# EAGLE board tc08n211 (EAGLE 6.6.0), part 1 of 2
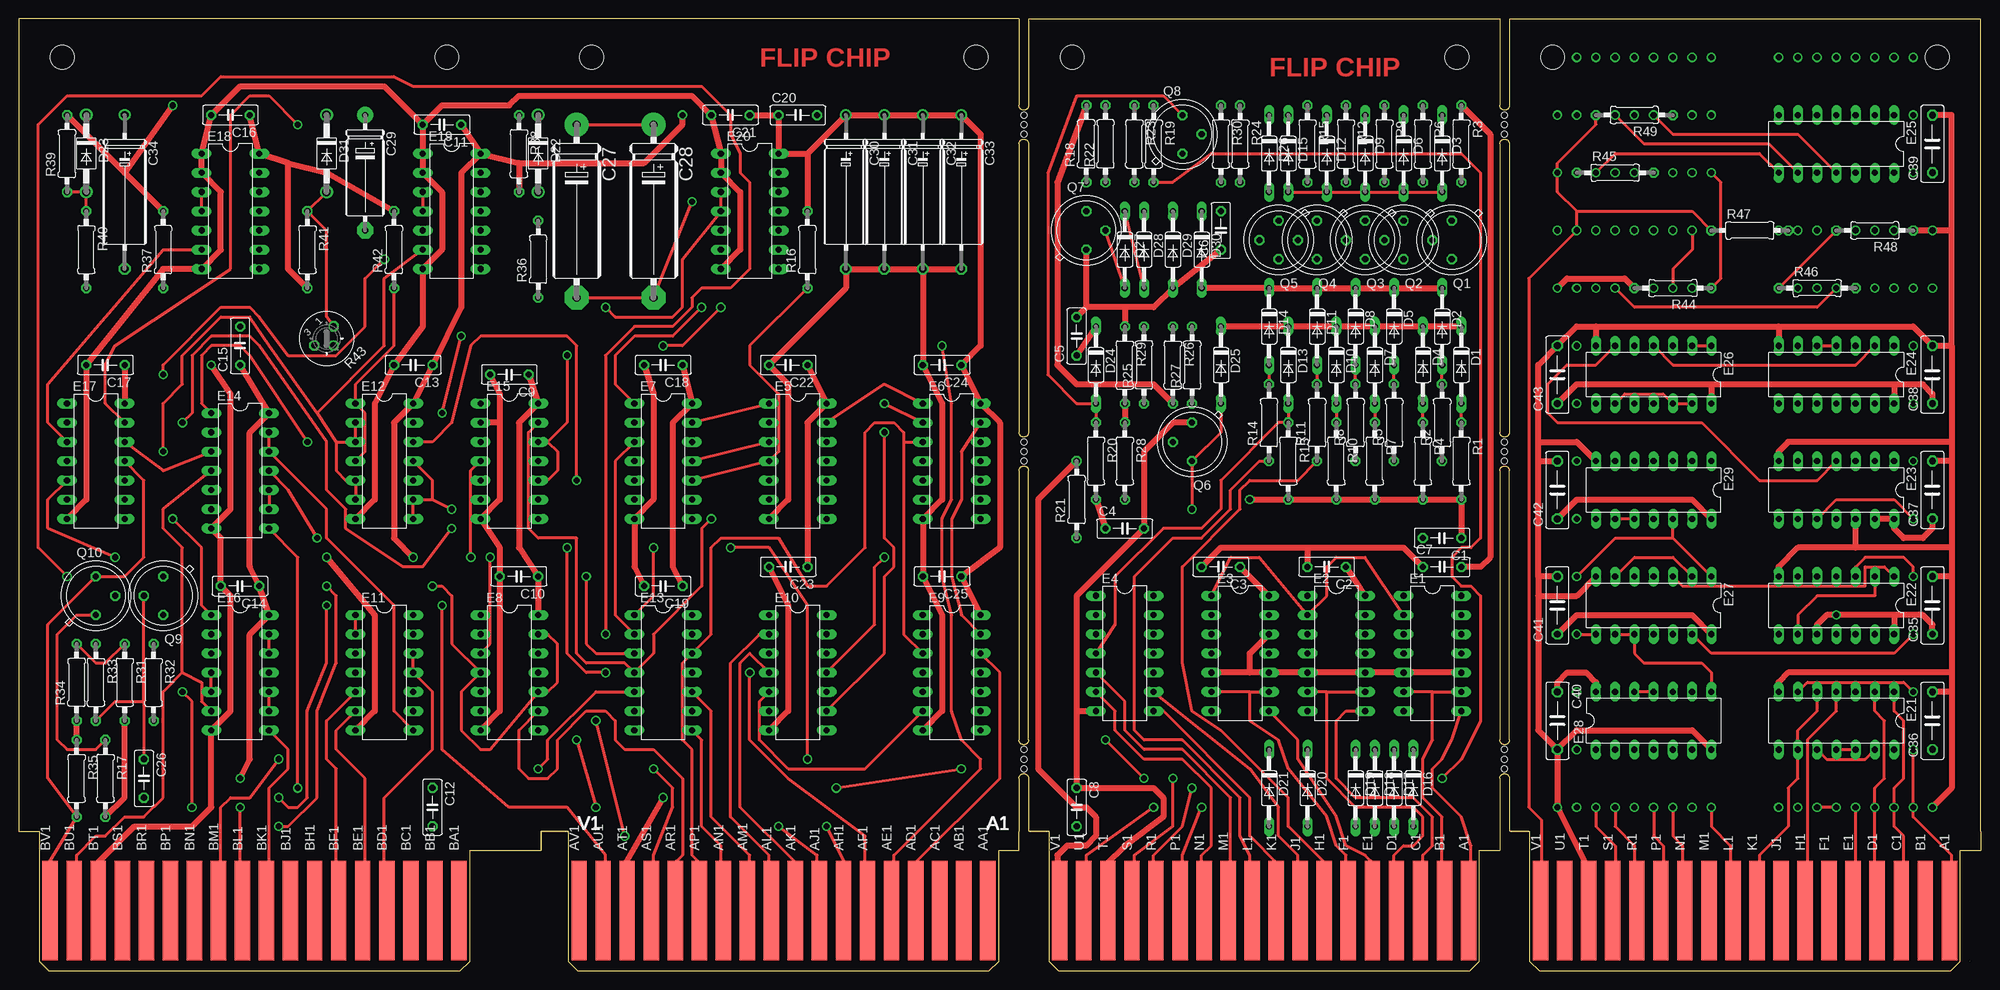
[diagram p0: board, top side]
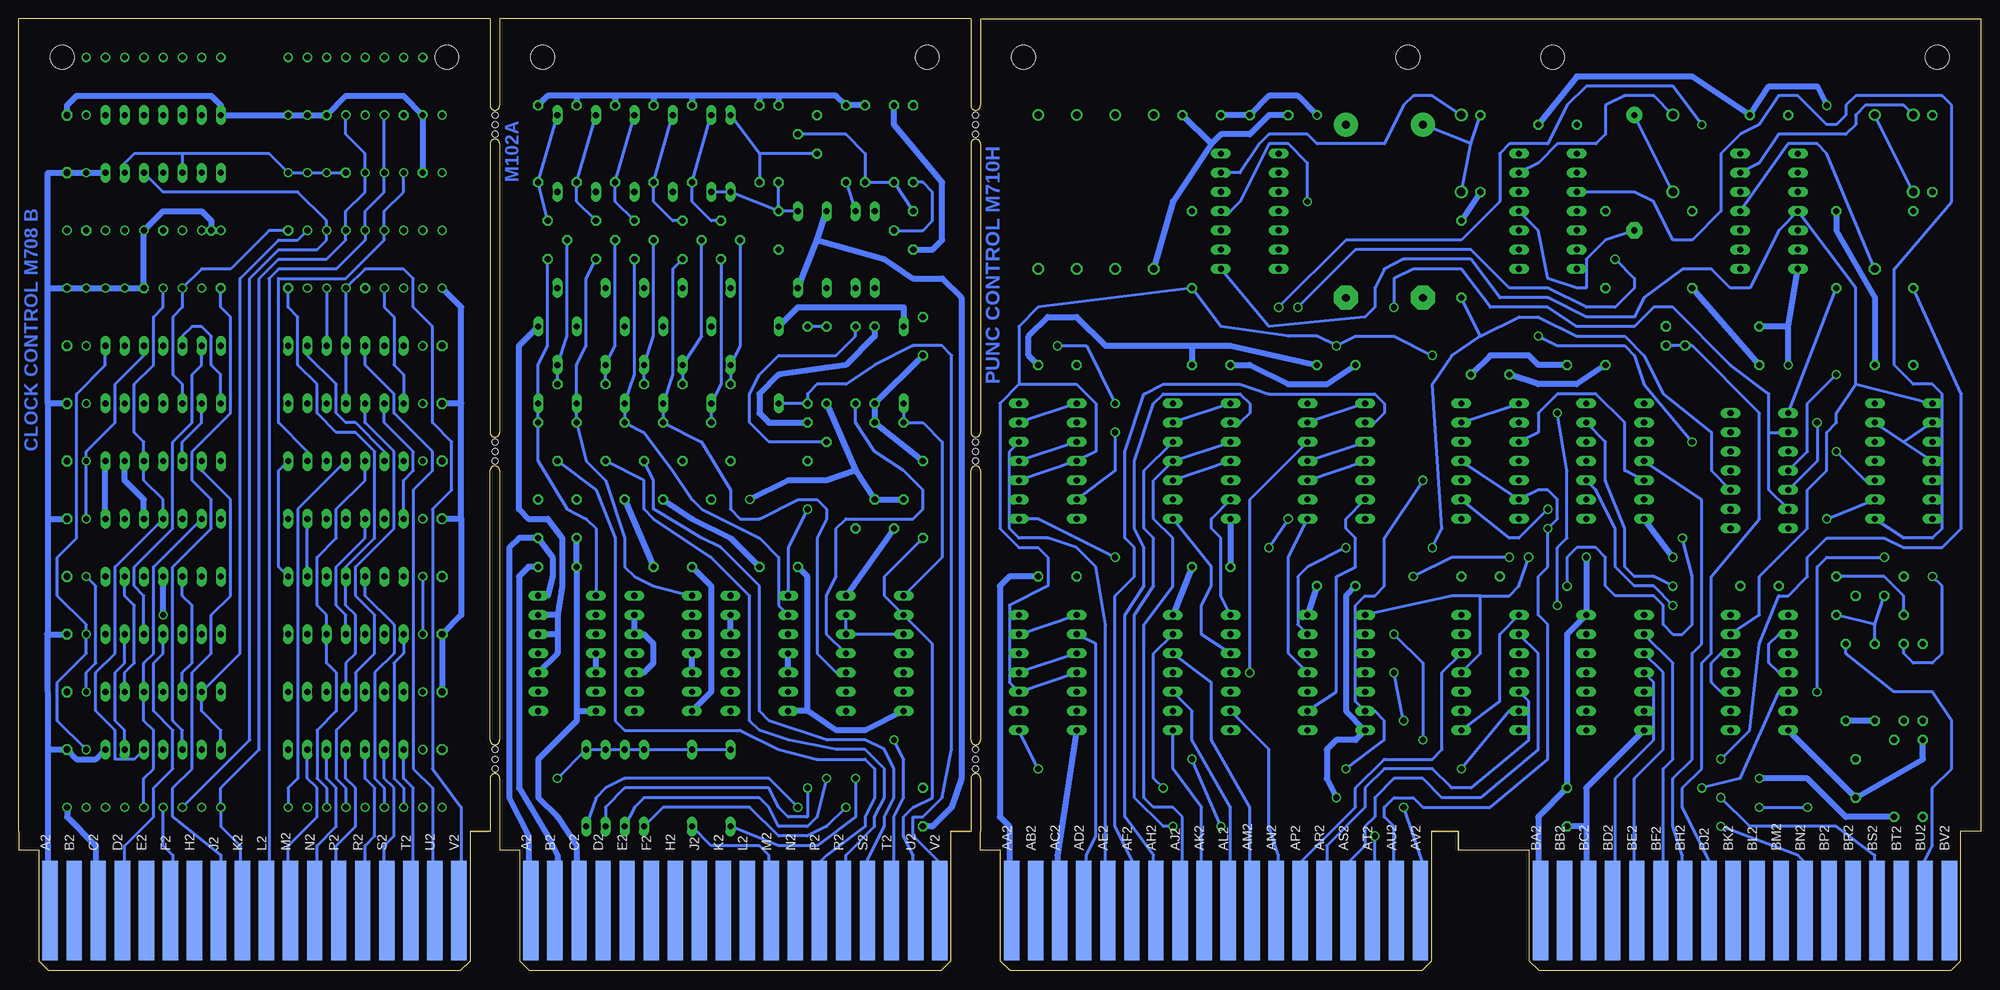
[diagram p1: board, bottom side, seen from below]

Size 259.08 x 125.73 mm. Coordinates in mm from the lower left corner, seen from the top.
Copper layers (1+16): Top 0.035mm / dielectric 1.5mm / Bottom 0.035mm
Design rules "16mils": minimum track width 16mil, minimum drill 32mil, track to track 15mil, track to pad 10mil, pad to pad 10mil, via to via 10mil, smd to smd 10mil, copper to edge 13mil, drill to drill 10mil, minimum pad ring 10mil, minimum via ring 8mil, stop-mask expansion 0mil, vias tented up to drill 0mil, thermal gap 10mil
Net classes: 1 Supply: width 0.813 mm

## Footprints (pad centres in the part's own frame; a part is rotated, then mirrored left to right if it is on the bottom)
C050-025X075 = drill 0.813 octagon: 1 -2.54,0; 2 2.54,0
E22-6 = drill 1.016 pad 3.15: + -11.43,0 | drill 1.016 pad 3.15 octagon: - 11.43,0
E15-5 = drill 0.813 pad 2.159: + -7.62,0 | drill 0.813 pad 2.159 octagon: - 7.62,0
E12-8 = drill 1.016: + -10.16,0 | drill 1.016 octagon: - 10.16,0
C075-032X103 = drill 0.914 octagon: 1 -3.81,0; 2 3.81,0
DO35-10 = drill 0.813 long: A 5.08,0; C -5.08,0
DO41-10 = drill 1.118: A 5.08,0; C -5.08,0
DIL14 = drill 0.813 long: 1 -7.62,-3.81; 2 -5.08,-3.81; 3 -2.54,-3.81; 4 0,-3.81; 5 2.54,-3.81; 6 5.08,-3.81; 7 7.62,-3.81; 8 7.62,3.81; 9 5.08,3.81; 10 2.54,3.81; 11 0,3.81; 12 -2.54,3.81; 13 -5.08,3.81; 14 -7.62,3.81
DECPROTO211 = hole 3.175: 253.365,120.65; 202.565,120.65; 139.116,120.65; 189.916,120.65; 126.416,120.65; 75.616,120.65; 56.515,120.65; 5.715,120.65 | hole 0.813: 132.715,69.85; 132.715,68.58; 132.715,67.31; 132.715,26.67; 132.715,27.94; 132.715,29.21; 132.715,113.03; 132.715,110.49; 132.715,111.76; 196.215,69.85; 196.215,68.58; 196.215,67.31; 196.215,26.67; 196.215,27.94; 196.215,29.21; 196.215,113.03; 196.215,110.49; 196.215,111.76
TO39 = drill 0.813 octagon: 1 0,-2.54; 2 2.54,0; 3 0,2.54
TO5 = drill 0.813 octagon: 1 0,-2.54; 2 2.54,0; 3 0,2.54
0207/10 = drill 0.813 octagon: 1 -5.08,0; 2 5.08,0
RJ6 = drill 0.813 octagon: A -1.778,-0.508; E 1.778,-0.508; S 0,1.27
EDGE-CON2 = smd 13.106 x 2.032: A1 7.938,4.128; B1 7.938,7.303; C1 7.938,10.477; D1 7.938,13.652; E1 7.938,16.828; F1 7.938,20.003; H1 7.938,23.177; J1 7.938,26.352; K1 7.938,29.527; L1 7.938,32.703; M1 7.938,35.877; N1 7.938,39.053; P1 7.938,42.227; R1 7.938,45.403; S1 7.938,48.578; T1 7.938,51.752; U1 7.938,54.928; V1 7.938,58.102 | smd 13.106 x 2.032 bottom: A2 7.938,4.128; B2 7.938,7.303; C2 7.938,10.477; D2 7.938,13.652; E2 7.938,16.828; F2 7.938,20.003; H2 7.938,23.177; J2 7.938,26.352; K2 7.938,29.527; L2 7.938,32.703; M2 7.938,35.877; N2 7.938,39.053; P2 7.938,42.227; R2 7.938,45.403; S2 7.938,48.578; T2 7.938,51.752; U2 7.938,54.928; V2 7.938,58.102
EDGE-CON4 = smd 13.106 x 2.032: AA1 7.938,4.128; AB1 7.938,7.303; AC1 7.938,10.477; AD1 7.938,13.652; AE1 7.938,16.828; AF1 7.938,20.003; AH1 7.938,23.177; AJ1 7.938,26.352; AK1 7.938,29.527; AL1 7.938,32.703; AM1 7.938,35.877; AN1 7.938,39.053; AP1 7.938,42.227; AR1 7.938,45.403; AS1 7.938,48.578; AT1 7.938,51.752; AU1 7.938,54.928; AV1 7.938,58.102; BA1 7.938,73.978; BB1 7.938,77.153; BC1 7.938,80.328; BD1 7.938,83.502; BE1 7.938,86.677; BF1 7.938,89.853; BH1 7.938,93.028; BJ1 7.938,96.203; BK1 7.938,99.377; BL1 7.938,102.552; BM1 7.938,105.728; BN1 7.938,108.903; BP1 7.938,112.078; BR1 7.938,115.252; BS1 7.938,118.427; BT1 7.938,121.603; BU1 7.938,124.778; BV1 7.938,127.953 | smd 13.106 x 2.032 bottom: AA2 7.938,4.128; AB2 7.938,7.303; AC2 7.938,10.477; AD2 7.938,13.652; AE2 7.938,16.828; AF2 7.938,20.003; AH2 7.938,23.177; AJ2 7.938,26.352; AK2 7.938,29.527; AL2 7.938,32.703; AM2 7.938,35.877; AN2 7.938,39.053; AP2 7.938,42.227; AR2 7.938,45.403; AS2 7.938,48.578; AT2 7.938,51.752; AU2 7.938,54.928; AV2 7.938,58.102; BA2 7.938,73.978; BB2 7.938,77.153; BC2 7.938,80.328; BD2 7.938,83.502; BE2 7.938,86.677; BF2 7.938,89.853; BH2 7.938,93.028; BJ2 7.938,96.203; BK2 7.938,99.377; BL2 7.938,102.552; BM2 7.938,105.728; BN2 7.938,108.903; BP2 7.938,112.078; BR2 7.938,115.252; BS2 7.938,118.427; BT2 7.938,121.603; BU2 7.938,124.778; BV2 7.938,127.953

## Placement (x,y rotation side)
C1  .01uF  [C050-025X075]  187.96,57.15 180 top
C2  .01uF  [C050-025X075]  172.72,53.34 180 top
C3  .01uF  [C050-025X075]  158.75,53.34 180 top
C4  .01uF  [C050-025X075]  146.05,58.42 0 top
C5  .01uF  [C050-025X075]  139.7,83.82 90 top
C6  .01uF  [C050-025X075]  158.75,97.79 90 top
C7  .01uF  [C050-025X075]  187.96,53.34 0 top
C8  .01uF  [C050-025X075]  139.7,21.59 270 top
C9  .01uf  [C050-025X075]  64.77,78.74 180 top
C10  .01uf  [C050-025X075]  66.04,52.07 180 top
C11  .01uf  [C050-025X075]  55.88,111.76 180 top
C12  .01uf  [C050-025X075]  54.61,21.59 270 top
C13  .01uf  [C050-025X075]  52.07,80.01 180 top
C14  .01uf  [C050-025X075]  29.21,50.8 180 top
C15  .01uf  [C050-025X075]  29.21,82.55 90 top
C16  .01uf  [C050-025X075]  27.94,113.03 180 top
C17  .01uf  [C050-025X075]  11.43,80.01 180 top
C18  .01uf  [C050-025X075]  85.09,80.01 180 top
C19  .01uf  [C050-025X075]  85.09,50.8 180 top
C20  .01uf  [C050-025X075]  102.87,113.03 0 top
C21  .01uf  [C050-025X075]  93.98,113.03 180 top
C22  .01uf  [C050-025X075]  101.6,80.01 180 top
C23  .01uf  [C050-025X075]  101.6,53.34 180 top
C24  .01uf  [C050-025X075]  121.92,80.01 180 top
C25  .01uf  [C050-025X075]  121.92,52.07 180 top
C26  .01uf  [C050-025X075]  16.51,25.4 270 top
C27  150  [E22-6]  73.66,100.33 270 top
C28  150  [E22-6]  83.82,100.33 270 top
C29  2.2uf  [E15-5]  45.72,105.41 270 top
C30  6.8uF  [E12-8]  109.22,102.87 270 top
C31  6.8uF  [E12-8]  114.3,102.87 270 top
C32  6.8uF  [E12-8]  119.38,102.87 270 top
C33  6.8uF  [E12-8]  124.46,102.87 270 top
C34  180  [E12-8]  13.97,102.87 270 top
C35  .01uf  [C075-032X103]  252.73,48.26 90 top
C36  .01uf  [C075-032X103]  252.73,33.02 90 top
C37  .01uf  [C075-032X103]  252.73,63.5 90 top
C38  .01uf  [C075-032X103]  252.73,78.74 90 top
C39  .01uf  [C075-032X103]  252.73,109.22 90 top
C40  .01uf  [C075-032X103]  203.2,33.02 270 top
C41  .01uf  [C075-032X103]  203.2,48.26 90 top
C42  .01uf  [C075-032X103]  203.2,63.5 90 top
C43  .01uf  [C075-032X103]  203.2,78.74 90 top
D1  1N4154  [DO35-10]  190.5,80.01 270 top
D2  1N4154  [DO35-10]  187.96,85.09 270 top
D3  1N4154  [DO35-10]  187.96,107.95 270 top
D4  1N4154  [DO35-10]  185.42,80.01 270 top
D5  1N4154  [DO35-10]  181.61,85.09 270 top
D6  1N4154  [DO35-10]  182.88,107.95 270 top
D7  1N4154  [DO35-10]  179.07,80.01 270 top
D8  1N4154  [DO35-10]  176.53,85.09 270 top
D9  1N4154  [DO35-10]  177.8,107.95 270 top
D10  1N4154  [DO35-10]  173.99,80.01 270 top
D11  1N4154  [DO35-10]  171.45,85.09 270 top
D12  1N4154  [DO35-10]  172.72,107.95 270 top
D13  1N4154  [DO35-10]  167.64,80.01 270 top
D14  1N4154  [DO35-10]  165.1,85.09 270 top
D15  1N4154  [DO35-10]  167.64,107.95 270 top
D16  1N4154  [DO35-10]  184.15,24.13 270 top
D17  1N4154  [DO35-10]  181.61,24.13 270 top
D18  1N4154  [DO35-10]  179.07,24.13 270 top
D19  1N4154  [DO35-10]  176.53,24.13 270 top
D20  1N4154  [DO35-10]  170.18,24.13 270 top
D21  1N4154  [DO35-10]  165.1,24.13 270 top
D22  1N4154  [DO41-10]  68.58,107.95 270 top
D23  1N4154  [DO41-10]  8.89,107.95 270 top
D24  1N4154  [DO35-10]  142.24,80.01 270 top
D25  1N4154  [DO35-10]  158.75,80.01 270 top
D26  1N4154  [DO35-10]  165.1,107.95 270 top
D27  1N914  [DO35-10]  146.05,95.25 270 top
D28  1N914  [DO35-10]  148.59,95.25 270 top
D29  1N914  [DO35-10]  152.4,95.25 270 top
D30  1N914  [DO35-10]  156.21,95.25 270 top
D31  1N4154  [DO41-10]  40.64,107.95 270 top
E1  74H40N  [DIL14]  186.69,41.91 270 top
E2  74H40N  [DIL14]  173.99,41.91 270 top
E3  74H40N  [DIL14]  161.29,41.91 270 top
E4  7400N  [DIL14]  146.05,41.91 270 top
E5  7474N  [DIL14]  102.87,67.31 270 top
E6  7474N  [DIL14]  123.19,67.31 270 top
E7  7474N  [DIL14]  85.09,67.31 270 top
E8  7400N  [DIL14]  64.77,39.37 270 top
E9  7474N  [DIL14]  123.19,39.37 270 top
E10  7404N  [DIL14]  102.87,39.37 270 top
E11  7430N  [DIL14]  48.26,39.37 270 top
E12  7401N  [DIL14]  48.26,67.31 270 top
E13  7404N  [DIL14]  85.09,39.37 270 top
E14  7400N  [DIL14]  29.21,66.04 270 top
E15  7474N  [DIL14]  64.77,67.31 270 top
E16  7440  [DIL14]  29.21,39.37 270 top
E17  7474N  [DIL14]  10.16,67.31 270 top
E18  9601  [DIL14]  27.94,100.33 270 top
E19  9601  [DIL14]  57.15,100.33 270 top
E20  9601  [DIL14]  96.52,100.33 270 top
E21  7401N  [DIL14]  240.03,33.02 180 top
E22  7474N  [DIL14]  240.03,48.26 180 top
E23  7474N  [DIL14]  240.03,63.5 180 top
E24  7400N  [DIL14]  240.03,78.74 180 top
E25  7400N  [DIL14]  240.03,109.22 180 top
E26  7400N  [DIL14]  215.9,78.74 180 top
E27  7400N  [DIL14]  215.9,48.26 180 top
E28  7430N  [DIL14]  215.9,33.02 0 top
E29  7420N  [DIL14]  215.9,63.5 180 top
E$1  [DECPROTO211]  0,0 0 top
Q1  PN3569  [TO39]  189.23,96.52 180 top
Q2  PN3569  [TO39]  182.88,96.52 180 top
Q3  PN3569  [TO39]  177.8,96.52 180 top
Q4  PN3569  [TO39]  171.45,96.52 180 top
Q5  PN3569  [TO39]  166.37,96.52 180 top
Q6  PN3569  [TO39]  154.94,69.85 180 top
Q7  PN3640  [TO39]  140.97,97.79 0 top
Q8  PN3569  [TO39]  153.67,110.49 0 top
Q9  DEC6534D  [TO5]  19.05,49.53 180 top
Q10  DEC6534D  [TO5]  10.16,49.53 0 top
R1  1.5K  [0207/10]  190.5,67.31 270 top
R2  470  [0207/10]  187.96,72.39 90 top
R3  1.8K  [0207/10]  190.5,109.22 270 top
R4  1.5K  [0207/10]  185.42,67.31 270 top
R5  470  [0207/10]  181.61,72.39 90 top
R6  1.8K  [0207/10]  185.42,109.22 270 top
R7  1.5K  [0207/10]  179.07,67.31 270 top
R8  470  [0207/10]  176.53,72.39 90 top
R9  1.8K  [0207/10]  180.34,109.22 270 top
R10  1.5K  [0207/10]  173.99,67.31 270 top
R11  470  [0207/10]  171.45,72.39 90 top
R12  1.8K  [0207/10]  175.26,109.22 270 top
R13  1.5K  [0207/10]  167.64,67.31 270 top
R14  470  [0207/10]  165.1,72.39 90 top
R15  1.8K  [0207/10]  170.18,109.22 270 top
R16  1K  [0207/10]  104.14,95.25 90 top
R17  56  [0207/10]  11.43,25.4 270 top
R18  47K  [0207/10]  140.97,109.22 90 top
R19  15K  [0207/10]  149.86,109.22 270 top
R20  1.5K  [0207/10]  142.24,67.31 270 top
R21  8.2K  [0207/10]  139.7,62.23 90 top
R22  1K  [0207/10]  143.51,109.22 90 top
R23  3.3K  [0207/10]  147.32,109.22 270 top
R24  2.7K  [0207/10]  161.29,109.22 270 top
R25  750  [0207/10]  148.59,80.01 90 top
R26  750  [0207/10]  152.4,80.01 270 top
R27  750  [0207/10]  154.94,80.01 90 top
R28  330  [0207/10]  146.05,67.31 270 top
R29  750  [0207/10]  146.05,80.01 270 top
R30  2.7K  [0207/10]  158.75,109.22 270 top
R31  5.6K  [0207/10]  13.97,38.1 270 top
R32  100  [0207/10]  17.78,38.1 270 top
R33  3K  [0207/10]  10.16,38.1 270 top
R34  3K  [0207/10]  7.62,38.1 90 top
R35  150  [0207/10]  7.62,25.4 270 top
R36  1K  [0207/10]  68.58,93.98 90 top
R37  1K  [0207/10]  19.05,95.25 90 top
R38  51K  [0207/10]  66.04,107.95 270 top
R39  51K  [0207/10]  6.35,107.95 90 top
R40  7.5K  [0207/10]  8.89,95.25 270 top
R41  15K  [0207/10]  38.1,95.25 270 top
R42  1K  [0207/10]  49.53,95.25 90 top
R43  50K  [RJ6]  40.64,83.5 225 top
R44  750  [0207/10]  218.44,90.17 180 top
R45  1.5K  [0207/10]  210.82,105.41 0 top
R46  750  [0207/10]  237.49,90.17 0 top
R47  750  [0207/10]  228.6,97.79 0 top
R48  1.5K  [0207/10]  245.11,97.79 180 top
R49  1.5K  [0207/10]  213.36,113.03 180 top
U$1  [EDGE-CON2]  259.08,0 90 top
U$2  [EDGE-CON4]  132.08,0 90 top
U$3  [FLIPCHIP]  78.74,124.46 270 top
U$8  [EDGE-CON2]  195.58,0 90 top

## Library data of the parts
C1-C29 C35-C43 R1-R42 R44-R49 = rcl
C30-C34 E18-E20 E$1 U$1-U$3 U$8 = dec-con
D1-D31 = diode
E1-E17 E21-E29 = 74xx-us
Q1-Q8 = transistor
Q9 Q10 = transistor-pnp
R43 = pot

## Nets
4.5MS: R43.E R43.S U$2.BJ2
4_SEC: R40.2 U$2.BM1
!CLEAR: E13.4 E15.1 E15.13 U$2.AJ1
!CLOCKB: E8.11 E13.1 E13.13 E15.4
!CLR_FLAG: E21.10 E21.13 E22.13 R46.1 R48.2
!FEED: E5.1 E5.13 E6.1 E6.13 E7.1 E7.13 E9.1 E9.13 E14.4 E16.6 U$2.BU1
!FEED_SW: E14.9 E14.10 R36.1 U$2.AT2
!INITIALIZE: E8.2 U$2.AS2
!IO_IN_INT: E12.10 U$2.BS2
!IO_IN_SKIP: E12.13 U$2.BN2
!IO_IRQ: E21.1 U$1.C1
!IO_SKIP: E21.4 U$1.H1
!IOP1: E25.9 U$1.L2
!IOP2: E27.5 U$1.R1
!IOP4: E25.12 U$1.F2
!MB3: E28.1 U$1.T2
!MB4: E28.2 U$1.S2
!MB6: E28.4 U$1.P2
!MB9: E27.12 E29.5 U$1.N1
!PUN_ACTIVE: E14.5 E15.6 E15.11 U$2.AU2
!SCR_ACTIVE: E16.8 U$2.BK1
+3V1: E25.10 E25.13 E27.4 E28.11 E28.12 R44.1 R45.2
+3V3 [Supply]: C5.1 D1.C D4.C D7.C D10.C D13.C D24.C D25.C E1.4 E1.5 E1.10 E1.12 E1.13 E2.4 E2.5 E2.10 E2.12 E2.13 E3.4 E3.5 E3.10 E3.12 E3.13 R21.2 R28.1 R29.2 U$8.V1
-0.7V: C8.2 D2.C D5.C D8.C D11.C D14.C D29.C D30.A
-1.5V: C6.2 D3.A D6.A D9.A D12.A D15.A D26.A D30.C R30.2
-15V [Supply]: C7.2 R3.1 R6.1 R9.1 R12.1 R15.1 R19.1 R23.1 R24.1 R30.1 U$8.B2
A1: E1.8 U$8.A1
AC4: E5.12 U$2.AH1
AC5: E5.2 U$2.AH2
AC6: E7.12 U$2.AF1
AC7: E7.2 U$2.AF2
AC8: E6.2 U$2.AE1
AC9: E6.12 U$2.AE2
AC10: E9.12 U$2.AD1
AC11: E9.2 U$2.AD2
B1: E1.6 E1.9 U$8.B1
C1: E2.8 U$8.C1
CLOCK: E22.11 U$1.D2
CLOCK_ENABLE: E23.6 U$1.J2
CLOCK_IOT: E27.1 E27.8 E29.1 E29.12 U$1.S1
CLOCKA: E5.3 E5.11 E7.3 E7.11 E13.2 U$2.AJ2
CLOCKB: E6.3 E6.11 E9.3 E9.11 E13.12 U$2.AP1
D1: E2.6 E2.9 U$8.D1
DEL_PUN1: E14.1 R37.1 U$2.AU1
DEL_PUN2: E17.5 U$2.BL1
E1: E3.8 U$8.E1
F1: E3.6 E3.9 U$8.F1
FLAG: E21.2 E22.2 E22.9 U$1.D1
FLAG_BUFFER: E21.5 E21.9 E22.5 U$1.K1
GND [Supply]: C1.2 C2.2 C3.2 C4.2 C5.2 C6.1 C7.1 C8.1 D29.A E1.7 E2.7 E3.7 E4.7 Q6.1 Q7.1 R22.2 R29.1 U$8.C2 U$8.T1
GND1: C9.2 C10.2 C11.2 C12.2 C13.2 C14.2 C15.2 C16.2 C17.2 C18.2 C19.2 C20.2 C21.2 C22.2 C23.2 C24.2 C25.2 C26.2 C30.- C31.- C32.- C33.- E5.7 E6.7 E7.7 E8.7 E9.7 E10.7 E11.7 E12.7 E13.7 E14.7 E15.2 E15.7 E16.7 E17.7 E18.1 E18.2 E18.7 E19.1 E19.2 E19.7 E20.1 E20.2 E20.7 R34.1 R35.1 U$2.AC2 U$2.AT1 U$2.BC2 U$2.BT1
GND2 [Supply]: C35.2 C36.2 C37.2 C38.2 C39.2 C40.2 C41.2 C42.2 C43.2 E21.7 E22.7 E23.2 E23.7 E23.12 E24.7 E25.7 E26.7 E27.7 E28.7 E29.7 R45.1 R48.1 R49.1 U$1.C2 U$1.T1
H1: R11.1 U$8.H1
INITIALIZE: E26.10 U$1.P1
IOP1: E8.5 U$2.AR2
IOP2: E8.9 U$2.AR1
IOP3: E25.8 E29.2
IOP4: E8.12 U$2.AP2
IOP5: E25.11 U$1.K2
IOP6: E27.2 E27.6 E29.13
IOP_02: E12.12 E13.6 U$2.AS1
IRQ_ENB: E21.3 E23.9 U$1.E1
J1: E4.9 U$8.J1
K1: E4.8 U$8.K1
L1: R14.1 U$8.L1
LOAD_COUNTER: E24.2 E26.4 E26.11 U$1.V2
M1: E4.5 U$8.M1
M2: D20.A U$8.M2
MB3(0): E11.1 E11.2 U$2.BF2
MB4(0): E11.11 E11.12 U$2.BD1
MB5: E28.3 U$1.R2
MB5(0): E11.4 U$2.BD2
MB6(0): E11.6 U$2.BE1
MB7: E28.5 U$1.N2
MB7(1): E11.3 U$2.BE2
MB8: E28.6 U$1.M2
MB8(0): E11.5 U$2.BF1
MB9: E26.5 U$1.U2
MB10: E29.4 U$1.L1
MB11: E24.1 E27.13 U$1.A1
MOTOR: E16.9 E16.10 E16.12 E16.13 E17.1 E18.3 E18.4 E20.8
N1: E4.6 U$8.N1
N$1: D27.A Q7.2 R18.1
N$2: E4.11 R25.1
N$3: Q6.2 R25.2
N$4: D27.C D28.A
N$5: R26.1 R27.2
N$6: Q7.3 Q8.2 R22.1 R23.2
N$7: D26.C Q8.1 R24.2
N$8: D24.A E4.1 Q8.3 R20.1
N$9: E4.3 E4.12 E4.13
N$10: D10.A E4.10 Q4.3 R10.1
N$11: D11.A Q4.2 R11.2
N$12: D16.C D17.C D18.C D19.C D20.C D21.C D28.C R19.2
N$13: D1.A E1.1 Q1.3 R1.1
N$14: D12.C Q4.1 R12.2
N$15: D13.A E4.4 Q5.3 R13.1
N$16: D14.A Q5.2 R14.2
N$17: D2.A Q1.2 R2.2
N$18: D15.C Q5.1 R15.2
N$19: D3.C Q1.1 R3.2
N$20: D4.A E2.1 Q2.3 R4.1
N$21: D5.A Q2.2 R5.2
N$22: D6.C Q2.1 R6.2
N$23: D7.A E3.2 Q3.3 R7.1
N$24: D8.A Q3.2 R8.2
N$25: D9.C Q3.1 R9.2
N$26: E11.8 E14.12 E14.13
N$27: E8.1 E8.8
N$28: E8.4 E8.10 E8.13 E14.11
N$29: E5.8 E10.3
N$30: E5.6 E10.1
N$31: E6.6 E10.9
N$32: E6.8 E10.11
N$33: E9.8 E10.13
N$34: E9.6 E10.5
N$35: E7.8 E13.11
N$36: E7.6 E13.9
N$37: E8.3 E13.3
N$38: E8.6 E13.5
N$39: Q9.3 Q10.2 R31.1 R34.2
N$40: Q9.1 Q10.1 R17.1
N$41: C26.1 Q9.2 R33.2
N$42: E14.8 E16.2 E16.4 E16.5
N$43: C34.- E18.11
N$44: E14.2 E14.6 E20.3 E20.4
N$45: E12.2 E12.3 E12.5 E12.6 E15.3 E17.10 E19.6
N$46: E17.8 E19.3 E19.4
N$47: E5.4 E5.10 E6.4 E6.10 E7.4 E7.10 E9.4 E9.10 E15.10 E15.12 E17.2 E17.4 E17.13 R16.1
N$49: C29.- E19.11
N$53: E16.1 E17.9
N$54: E14.3 E17.12
N$56: C27.- C28.- E20.11
N$57: D22.C E20.13
N$58: C27.+ C28.+ D22.A R38.1
N$59: D23.C E18.13
N$60: C34.+ D23.A R39.1 R40.1
N$61: E17.3 E18.6
N$63: D31.C E19.13
N$64: C29.+ D31.A R41.1 R43.A
N$85: E27.9 E27.10 E28.8
N$87: E22.1 E27.3
N$89: E26.1 E26.2 E29.6
N$91: E27.11 E29.9 E29.10
N$92: E26.9 E26.12 E26.13 E29.8
N$93: E23.4 E26.6
N$94: E23.10 E24.3
N$95: E21.6 E21.8 E22.3 E26.3
N$96: E23.5 E24.9
N$97: E24.4 E24.5 E24.8
N$98: E22.12 E24.6
N$100: E21.11 E21.12 E23.3 E23.11 E26.8
OVERFLOW: E24.10 R47.1 R49.2 U$1.V1
P1: D16.A U$8.P1
P2: R2.1 U$8.P2
PB0: E10.4 U$2.AK1
PB1: E10.2 U$2.AL1
PB2: E13.10 U$2.AM1
PB3: E13.8 U$2.AN1
PB4: E10.8 U$2.AK2
PB5: E10.10 U$2.AL2
PB6: E10.12 U$2.AM2
PB7: E10.6 U$2.AN2
PUN_DONE: E12.1 E12.4 R42.1 U$2.BH2
PUN_FLAG: E12.8 E12.9 E12.11 E15.9
R1: D17.A U$8.R1
R2: R5.1 U$8.R2
S1: D18.A U$8.S1
S2: R8.1 U$8.S2
SYNC_BIAS: R32.1 U$2.BU2
SYNC_PUN: R33.1 U$2.AV2
SYNC_PUN0: E17.11 Q10.3 R35.2 U$2.BV1
T2: D21.A U$8.T2
U1: D19.A U$8.U1
U2: E4.2 R21.1 U$8.U2
V2: D25.A E1.2 E2.2 E3.1 Q6.3 R27.1 U$8.V2
VCC [Supply]: C1.1 C2.1 C3.1 C4.1 E1.14 E2.14 E3.14 E4.14 R1.2 R4.2 R7.2 R10.2 R13.2 R18.2 R20.2 R26.2 R28.2 U$8.A2
VCC1: C9.1 C10.1 C11.1 C12.1 C13.1 C14.1 C15.1 C16.1 C17.1 C18.1 C19.1 C20.1 C21.1 C22.1 C23.1 C24.1 C25.1 C30.+ C31.+ C32.+ C33.+ E5.14 E6.14 E7.14 E8.14 E9.14 E10.14 E11.14 E12.14 E13.14 E14.14 E15.14 E16.14 E17.14 E18.14 E19.14 E20.14 R16.2 R17.2 R31.2 R32.2 R36.2 R37.2 R38.2 R39.2 R41.2 R42.2 U$2.AA2 U$2.BA2
VCC2 [Supply]: C35.1 C36.1 C37.1 C38.1 C39.1 C40.1 C41.1 C42.1 C43.1 E21.14 E22.4 E22.10 E22.14 E23.1 E23.13 E23.14 E24.14 E25.14 E26.14 E27.14 E28.14 E29.14 R44.2 R46.2 R47.2 U$1.A2